# Allegro board QUADCOPTER1brd2_1.brd
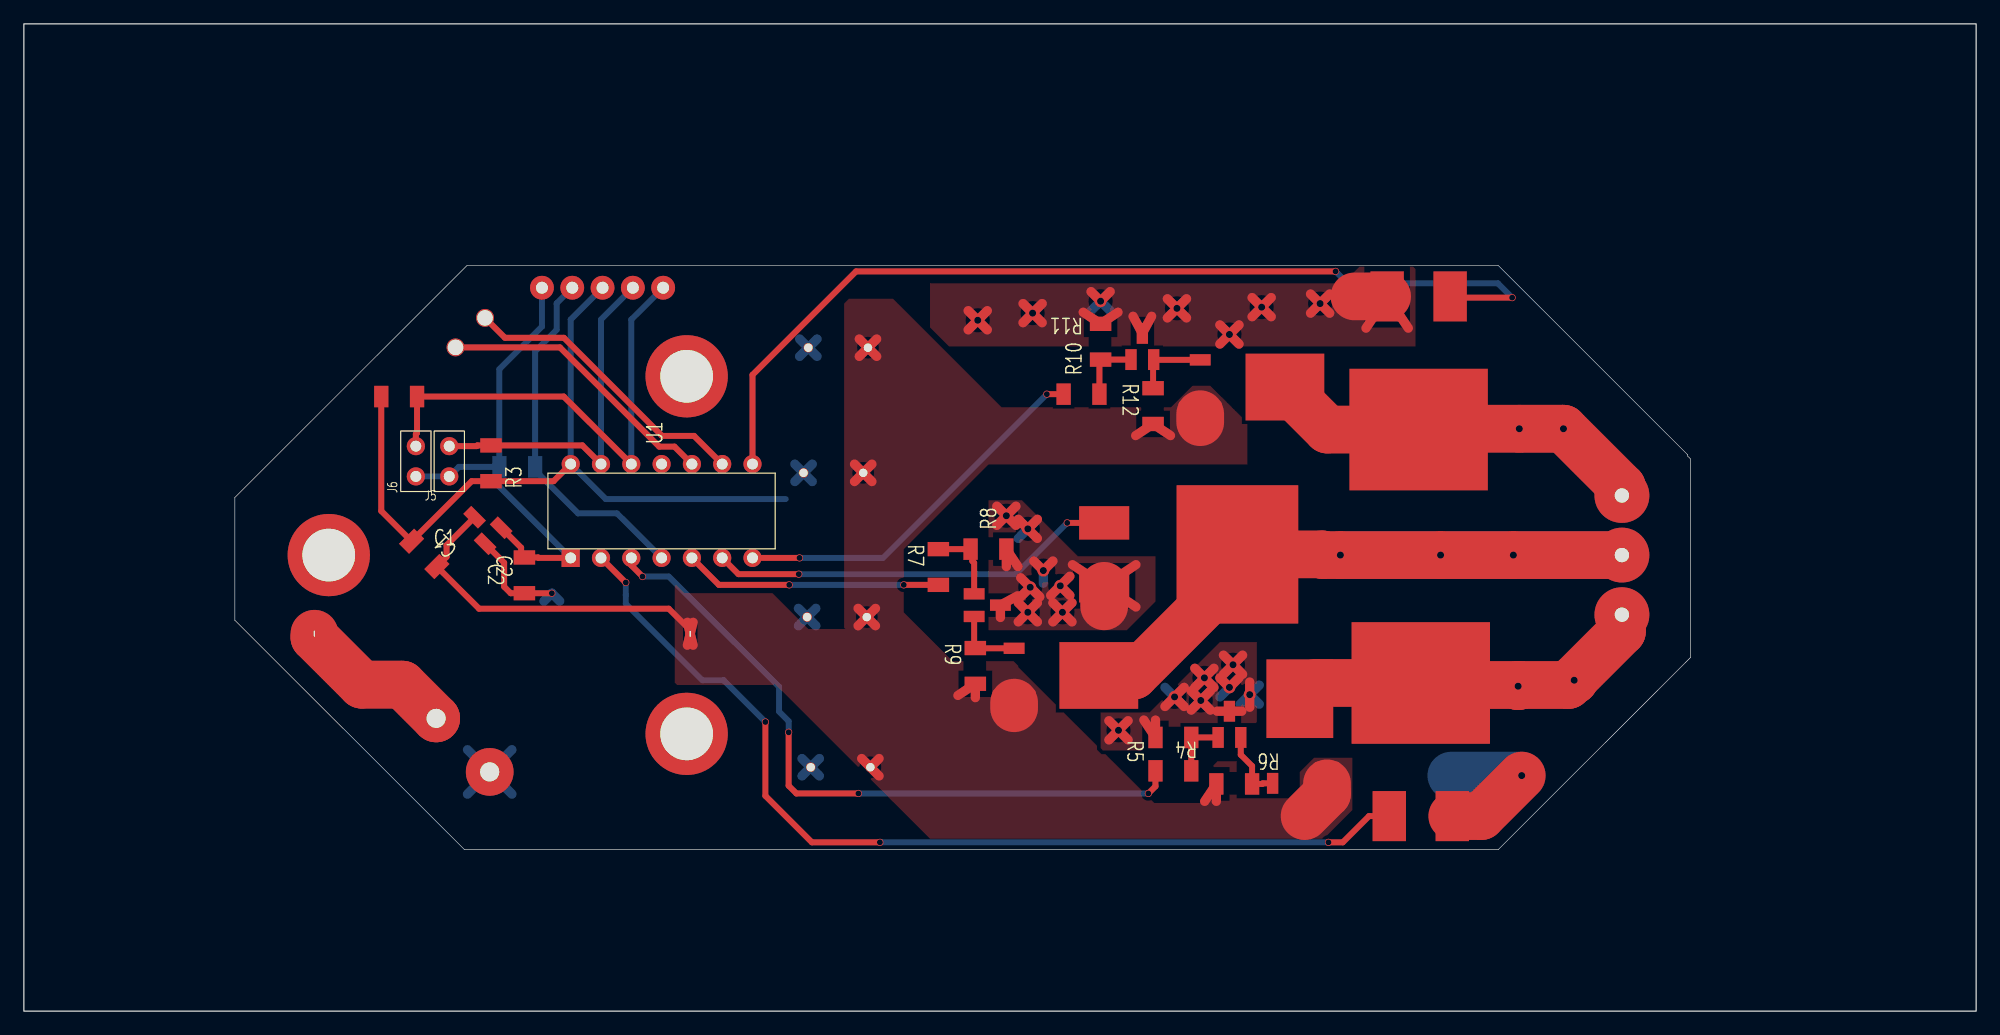
[diagram p0: board, top side]
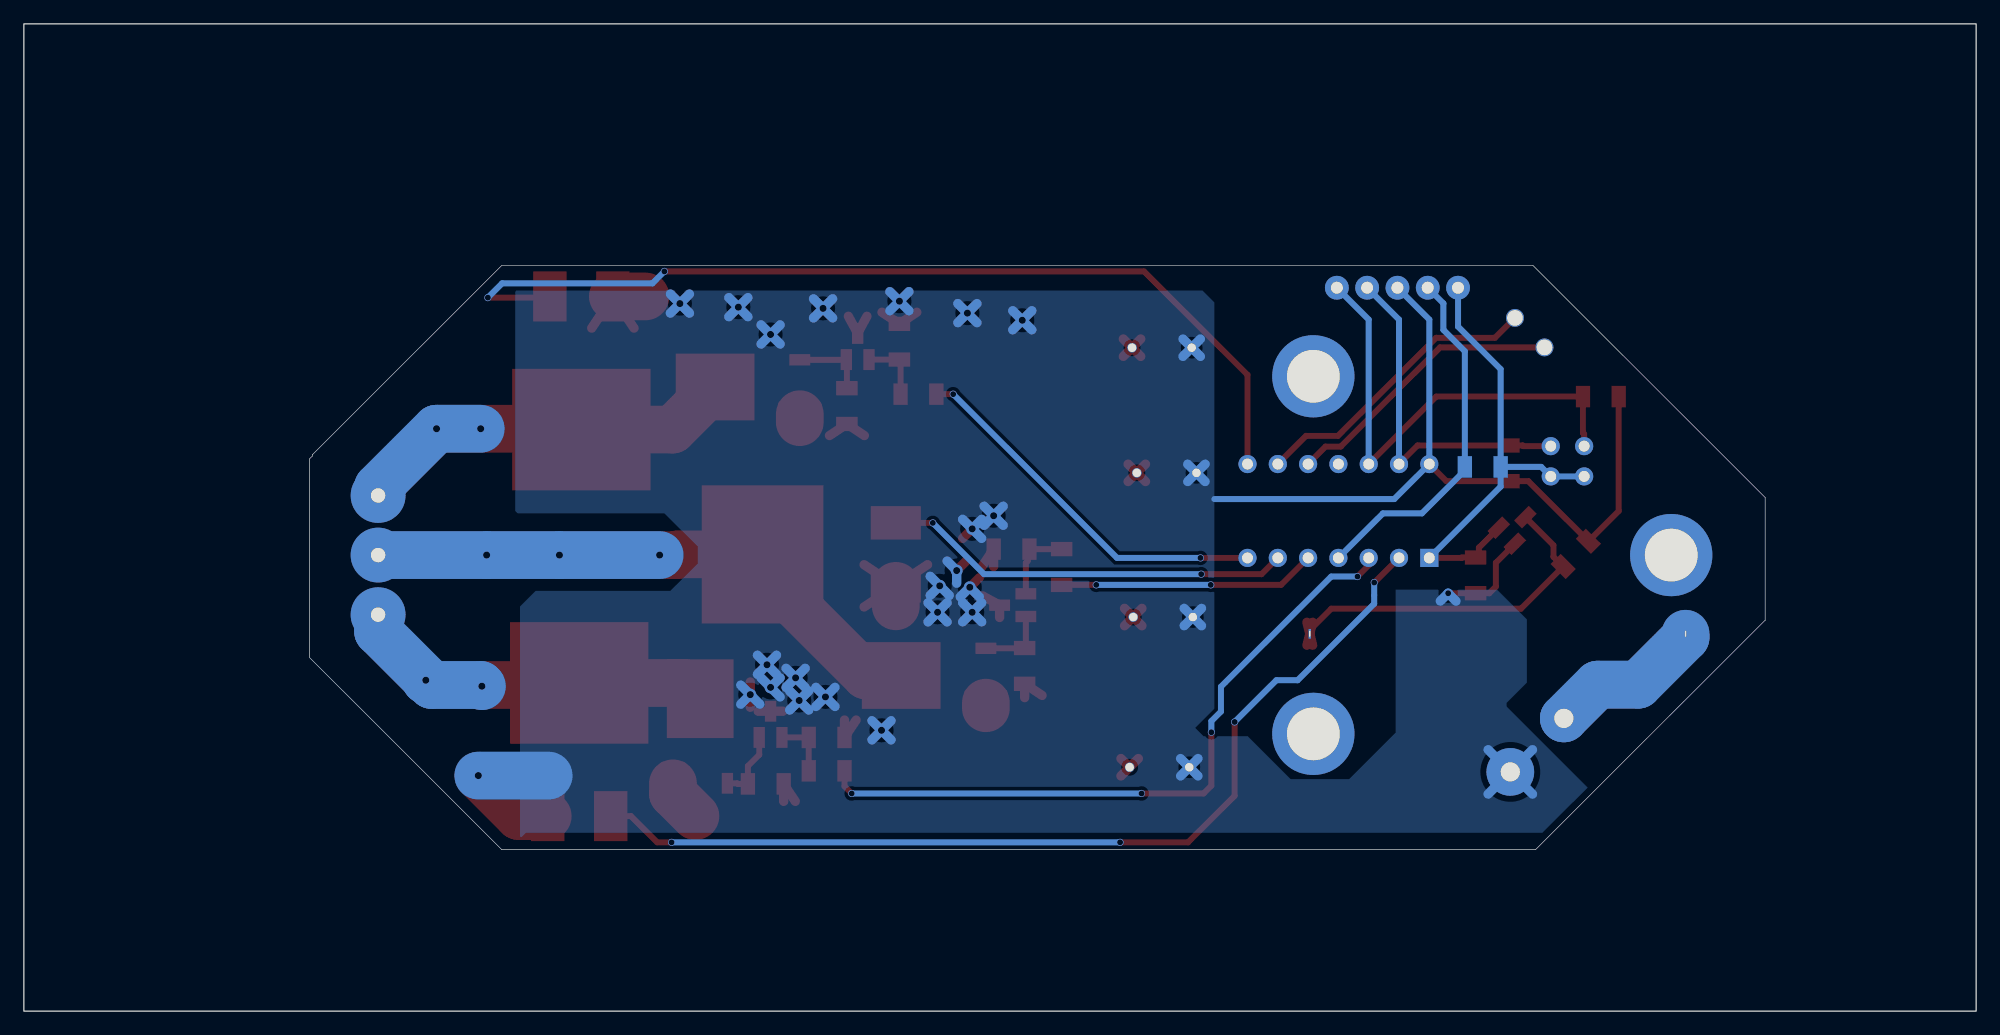
[diagram p1: board, bottom side, seen from below]

Outline 163.65 x 82.83 mm; copper layers: TOP, BOTTOM. Coordinates in mm from the lower left corner of the outline.
Outline path: rectangle 0,0 163.65,82.83 ; 17.69,43.1 17.69,32.8 36.94,13.54 123.58,13.54 139.7,29.66 139.7,46.34 139.48,46.57 139.48,46.68 123.58,62.57 37.16,62.57 17.69,43.1

## Placement (name value [footprint] x y rotation side)
C1  1uF  [SMD_CAP_1206]  33.56 38.36 135 top
C2  1uF  [SMD_CAP_1206]  41.96 36.56 270 top
C3  100uF  [CAP250]  73.76 58.66 180 top
C4  100uF  [CAP250]  73.36 48.16 180 top
C5  100uF  [CAP250]  73.66 36.06 180 top
C6  100uF  [CAP250]  73.96 23.46 180 top
F1  FUSE  [FUSECLIP]  4.36 11.66 0 top
FET1  ON NTD5867  [INF-PG-SOT23_L]  101.06 24.06 90 top
FET2  ON NTD5867  [INF-PG-SOT23_L]  80.76 34.06 0 top
FET3  ON NTD5867  [INF-PG-SOT23_L]  93.76 55.76 90 top
FET4  ON NTD20P06L  [INF-PG-TO252-3-1_N]  106.96 23.86 90 top
FET5  ON NTD20P06L  [INF-PG-TO252-3-1_N]  87.76 28.16 0 top
FET6  ON NTD20P06L  [INF-PG-TO252-3-1_N]  103.36 52.36 0 top
FET7  IRF640NS  [D2PAK]  94.46 -3.64 0 top
FET8  IRF640NS  [D2PAK]  70.56 60.96 270 top
FET9  IRF640NS  [D2PAK]  139.56 79.96 180 top
J1  CON2  [KDCONN2]  34.56 24.56 315 top
J2  CON2  [KDCONN2_2]  38.66 58.16 225 top
J3  To Motor  [ED1362]  136.46 30.76 90 top
J4  CON5  [CONN5]  42.16 61.96 270 top
J5  JUMPER  [JUMPER2]  35.66 44.86 90 top
J6  JUMPER  [JUMPER2]  32.86 44.86 90 top
NOREF  -  [unnamed]  55.56 53.26 0 top
NOREF#2  -  [unnamed]  25.56 38.26 0 top
NOREF#3  -  [unnamed]  55.56 23.26 0 top
Q1  Diodes_AP1117T50L-U  [INF-PG-SOT23_L]  38.56 40.66 135 top
R1  10k  [SMD_RES_1206]  41.36 45.66 180 bottom
R2  10k  [SMD_RES_1206]  31.46 51.56 0 top
R3  10k  [SMD_RES_1206]  39.16 45.96 90 top
R4  10k  [SMD_RES_1206]  96.36 20.16 180 top
R5  10k  [SMD_RES_1206]  96.36 22.96 0 top
R6  10k  [SMD_RES_1206]  101.46 19.06 180 top
R7  10k  [SMD_RES_1206]  76.66 37.26 270 top
R8  10k  [SMD_RES_1206]  80.86 38.76 180 top
R9  10k  [SMD_RES_1206]  79.76 28.96 270 top
R10  10k  [SMD_RES_1206]  88.66 51.76 180 top
R11  10k  [SMD_RES_1206]  90.26 56.16 270 top
R12  10k  [SMD_RES_1206]  94.66 50.76 270 top
U1  PIC16F1503  [PIC16FL1503]  53.46 41.96 90 top

## Library data of the parts
C1-C6 = CAP
F1 = FUSE
FET1-FET3 = ON NTD5867
FET4-FET6 = ON NTD20P06L_0
FET7-FET9 = IRF640NS_0
J1 J2 = CON2
J3 = CON3
J4 = CON5
J5 J6 = JUMPER: User Part Number: ***
Q1 = Diodes_AP1117T50L-U_1
R1-R12 = R
U1 = PIC16LF1503_4

## Footprints (pads in the part's own frame, mm; a bottom-side part is the same pattern mirrored in y, then rotated)
CAP250
  round 0.8 hole 0.7: 1(3,3) 2(8,3)
CONN5
  round 2 hole 1: 1(1.27,11.43) 2(1.27,8.89) 3(1.27,6.35) 4(1.27,3.81) 5(1.27,1.27)
D2PAK
  rect 2.8x4.2 smd: 1(20,20) 3(25.28,20)
  rect 11.6x10.2 smd: 2(22.64,31.17)
ED1362
  round 4.6 hole 1.2: 1(2.5,2.5) 2(7.5,2.5) 3(12.5,2.5)
FUSECLIP
  rect 0.2x0.8 hole 0.1x0.5: 1(20,20) 2(51.5,20)
INF-PG-SOT23_L
  rect 1.75x0.95 smd: 1(-1.1,0.95) 2(-1.1,-0.95) 3(1.1,0)
INF-PG-TO252-3-1_N
  rect 1.75x0.95 smd: 1(-4.75,2.28) 3(-4.75,-2.28)
  rect 6.6x5.6 smd: 2(2.35,0)
JUMPER2
  round 1.524 hole 0.914: 1(0,0) 2(2.54,0)
KDCONN2
  round 4 hole 1.6: 1(0,0) 2(6.35,0)
KDCONN2_2
  round 1.5 hole 1.3: 1(0,0) 2(3.5,0)
PIC16FL1503
  rect 1.524x1.524 hole 0.914: 1(-3.937,7.62)
  round 1.524 hole 0.914: 2(-3.937,5.08) 3(-3.937,2.54) 4(-3.937,0) 5(-3.937,-2.54) 6(-3.937,-5.08) 7(-3.937,-7.62) 8(3.937,-7.62) 9(3.937,-5.08) 10(3.937,-2.54) 11(3.937,0) 12(3.937,2.54) 13(3.937,5.08) 14(3.937,7.62)
SMD_CAP_1206
  rect 1.2x1.8 smd: 1(-1.5,0) 2(1.5,0)
SMD_RES_1206
  rect 1.2x1.8 smd: 1(-1.5,0) 2(1.5,0)
unnamed
  round 6.9 hole 4.42: (0,0)

## Nets
12V: C1.1 C3.1 C4.1 C5.1 C6.1 F1.2 FET4.3(S) FET5.3(S) FET6.3(S) Q1.3(VIN) R6.2 R9.2 R12.2
GND: C1.2 C2.2 C3.2 C4.2 C5.2 C6.2 FET1.3(S) FET2.3(S) FET3.3(S) FET7.3(S) FET8.3(S) FET9.3(S) J1.2 J4.3 Q1.1(GND) R2.1 R3.1 R5.1 R8.1 R11.1 U1.14(VSS)
A: FET4.2(D) FET7.2(D) J3.1
ADDR0: J4.2 J5.2 R3.2 U1.13(ICSPDAT/ADDR0)
ADDR1: J4.1 J6.2 R2.2 U1.12(ICSPCLK/ADDR1)
AHIGH: R4.2 U1.3(RA4)
ALOW: FET7.1(G) U1.2(RA5)
B: FET5.2(D) FET8.2(D) J3.2
BHIGH: R7.2 U1.5(RC5)
BLOW: FET8.1(G) U1.6(RC4)
C: FET6.2(D) FET9.2(D) J3.3
CHIGH: R10.2 U1.7(RC3)
CLOW: FET9.1(G) U1.8(RC2)
NMCLR: J4.4 R1.1 U1.4(NMCLR)
SCL: J2.2 U1.10(SCL)
SDA: J2.1 U1.9(SDA)
VEXT: C2.1 J4.5 J5.1 J6.1 Q1.2(VOUT) R1.2 U1.1(VDD)
N76044: F1.1 J1.1
N143086: FET1.1(G) R4.1 R5.2
N143844: FET2.1(G) R7.1 R8.2
N143928: FET2.2(D) FET5.1(G) R9.1
N144222: FET3.2(D) FET6.1(G) R12.1
N144242: FET3.1(G) R10.1 R11.2
N158488: FET1.2(D) FET4.1(G) R6.1

Pads without a net: U1 11

## Via types
v1: diameter 0.6, hole 0.5, TOP to BOTTOM, 17 vias
v2: diameter 1, hole 0.6, TOP to BOTTOM, 29 vias

## Routing (per net, layer and track width the routed paths; a pad name or vN(x,y) marks a point on that pad's centre or on a via; arc(x,y) is an arc through that point)
12V: length 82.5
  TOP w0.5: Q1.3 35.43,39.09 35.43,38.12 C1.1 38.16,33.76 54.06,33.76 55.86,31.96 F1.2
  TOP w0.781: 70.03,54.94 C3.1 ; C3.1 71.49,56.39 ; C3.1 71.49,54.94 ; C3.1 70.03,56.39 ; 79.76,26.3 R9.2 78.3,26.49 ; C5.1 71.39,33.79 ; C5.1 69.93,33.79 ; C5.1 69.93,32.34 ; C5.1 71.39,32.34 ; C6.1 71.69,19.74 ; C6.1 70.23,21.19 ; C6.1 71.69,21.19 ; 55.62,32.62 F1.2 ; F1.2 56.1,32.62 ; F1.2 56.1,30.7 ; F1.2 55.62,30.7 ; 97.18,49.31 FET6.3 ; FET6.3 100.04,50.86 ; FET6.3 97.18,50.86 ; FET6.3 100.04,49.31 ; C4.1 71.09,45.89 ; C4.1 71.09,44.44 ; C4.1 69.63,44.44 ; C4.1 69.63,45.89 ; 98.99,17.6 R6.2 99.96,17.6 ; 108.46,17.68 FET4.3 ; FET4.3 108.46,20.55 ; FET4.3 110.02,20.55 ; FET4.3 110.02,17.68 ; FET5.3 84.44,25.11 ; FET5.3 84.44,26.66 ; FET5.3 81.58,25.11 ; FET5.3 81.58,26.66 ; 93.2,48.29 R12.2 96.12,48.29
  TOP w4: FET4.3 109.24,18.24 107.36,16.36 ; FET5.3 83.01,25.41 ; FET6.3 98.61,49.41
GND: length 320.4
  TOP w0.5: R2.1 29.96,41.96 C1.2 37.54,44.46 R3.1 44.4,44.46 U1.14 ; Q1.1 40.26,37.62 40.26,35.61 40.81,35.06 C2.2 v1(44.26,35.06)
  TOP w0.781: v2(103.76,59.06) 104.56,59.86 ; v2(103.76,59.06) 102.96,59.86 ; v2(103.76,59.06) 102.96,58.26 ; v2(103.76,59.06) 104.56,58.26 ; 81.56,42.36 v2(82.36,41.56) ; v2(82.36,41.56) 83.16,42.36 ; v2(82.36,41.56) 81.56,40.76 ; v2(82.36,41.56) 83.16,40.76 ; v2(98.66,26.06) 99.46,26.86 ; v2(98.66,26.06) 99.46,25.26 ; v2(98.66,26.06) 97.86,26.86 ; v2(98.66,26.06) 97.86,25.26 ; v2(98.96,27.96) 99.76,28.76 ; v2(98.96,27.96) 98.16,28.76 ; v2(98.96,27.96) 98.16,27.16 ; v2(98.96,27.96) 99.76,27.16 ; 100.26,55.97 v2(101.06,56.77) ; v2(101.06,56.77) 100.26,57.57 ; v2(101.06,56.77) 101.86,55.97 ; v2(101.06,56.77) 101.86,57.57 ; 88.8,58.64 R11.1 91.72,58.64 ; 84.66,37.76 v2(85.46,36.96) 86.26,37.76 ; v2(84.56,58.56) 85.36,59.36 ; v2(84.56,58.56) 83.76,57.76 ; v2(84.56,58.56) 85.36,57.76 ; v2(84.56,58.56) 83.76,59.36 ; v2(87.06,33.46) 87.86,34.26 ; v2(87.06,33.46) 86.26,32.66 ; v2(87.06,33.46) 86.26,34.26 ; v2(87.06,33.46) 87.86,32.66 ; 86.08,34.88 v2(86.88,35.68) ; v2(86.88,35.68) 87.68,34.88 ; v2(86.88,35.68) 87.68,36.48 ; 93.89,24.42 R5.1 94.86,24.42 ; v2(101.36,29.06) 102.16,28.26 ; v2(101.36,29.06) 100.56,28.26 ; v2(101.36,29.06) 102.16,29.86 ; v2(101.36,29.06) 100.56,29.86 ; 92.98,58.3 FET3.3 94.54,58.3 ; 102.09,25.16 FET1.3 100.03,25.16 ; v2(84.16,33.46) 84.96,32.66 ; v2(84.16,33.46) 83.36,32.66 ; v2(84.16,33.46) 83.36,34.26 ; v2(84.16,33.46) 84.96,34.26 ; FET8.3 93.22,37.46 ; FET8.3 87.9,37.46 ; FET8.3 93.22,33.91 ; v2(84.16,40.46) 84.96,41.26 ; v2(84.16,40.46) 84.96,39.66 ; v2(84.16,40.46) 83.36,41.26 ; 91.06,60.36 v2(90.26,59.56) 89.46,60.36 ; 83.33,37.3 R8.1 82.36,37.3 ; 116.05,57.3 FET9.3 112.51,57.3 ; 107.86,60.16 v2(108.66,59.36) ; v2(108.66,59.36) 109.46,60.16 ; v2(108.66,59.36) 109.46,58.56 ; v2(108.66,59.36) 107.86,58.56 ; v2(91.76,23.56) 92.56,22.76 ; v2(91.76,23.56) 90.96,22.76 ; v2(91.76,23.56) 90.96,24.36 ; v2(91.76,23.56) 92.56,24.36 ; v2(79.96,57.96) 80.76,57.16 ; v2(79.96,57.96) 79.16,57.16 ; v2(79.96,57.96) 79.16,58.76 ; v2(79.96,57.96) 80.76,58.76 ; 101.86,27.96 v2(101.06,27.16) 100.26,27.96 ; 102.76,25.5 v2(102.76,26.56) 102.76,27.62 ; v2(96.66,58.96) 97.46,58.16 ; v2(96.66,58.96) 97.46,59.76 ; v2(96.66,58.96) 95.86,59.76 ; v2(96.66,58.96) 95.86,58.16 ; 83.29,34.84 FET2.3 81.86,33.03 ; v2(84.36,35.56) 85.16,34.76 ; v2(84.36,35.56) 83.56,34.76 ; v2(84.36,35.56) 83.56,36.36 ; v2(96.46,26.36) 97.26,27.16 ; v2(96.46,26.36) 97.26,25.56 ; v2(96.46,26.36) 95.66,25.56
  TOP w4: FET7.3 122.16,16.36 v2(125.56,19.76) ; FET9.3 111.54,59.96 ; FET8.3 90.56,33.96
  BOTTOM w0.5: J4.3 45.84,58.02 U1.14 48.78,42.96 63.86,42.96
  BOTTOM w0.781: v2(103.76,59.06) 104.56,59.86 ; v2(103.76,59.06) 104.56,58.26 ; v2(103.76,59.06) 102.96,59.86 ; v2(103.76,59.06) 102.96,58.26 ; 83.36,34.26 v2(84.16,33.46) ; v2(84.16,33.46) 84.96,34.26 ; v2(84.16,33.46) 83.36,32.66 ; v2(84.16,33.46) 84.96,32.66 ; 64.63,45.89 C4.2 ; C4.2 66.09,44.44 ; C4.2 64.63,44.44 ; C4.2 66.09,45.89 ; 95.66,27.16 v2(96.46,26.36) ; v2(96.46,26.36) 95.66,25.56 ; v2(96.46,26.36) 97.26,25.56 ; v2(96.46,26.36) 97.26,27.16 ; v2(91.76,23.56) 92.56,24.36 ; v2(91.76,23.56) 92.56,22.76 ; v2(91.76,23.56) 90.96,24.36 ; v2(91.76,23.56) 90.96,22.76 ; C5.2 66.39,32.34 ; C5.2 64.93,33.79 ; C5.2 66.39,33.79 ; C5.2 64.93,32.34 ; v2(101.06,56.77) 101.86,55.97 ; v2(101.06,56.77) 100.26,55.97 ; v2(101.06,56.77) 100.26,57.57 ; v2(101.06,56.77) 101.86,57.57 ; 83.76,57.76 v2(84.56,58.56) ; v2(84.56,58.56) 85.36,59.36 ; v2(84.56,58.56) 85.36,57.76 ; v2(84.56,58.56) 83.76,59.36 ; v2(87.06,33.46) 87.86,34.26 ; v2(87.06,33.46) 86.26,34.26 ; v2(87.06,33.46) 87.86,32.66 ; v2(87.06,33.46) 86.26,32.66 ; 81.56,40.76 v2(82.36,41.56) ; v2(82.36,41.56) 81.56,42.36 ; v2(82.36,41.56) 83.16,42.36 ; v2(82.36,41.56) 83.16,40.76 ; 65.23,21.19 C6.2 ; C6.2 66.69,21.19 ; C6.2 66.69,19.74 ; C6.2 65.23,19.74 ; 43.6,34.41 v1(44.26,35.06) 44.92,34.41 ; v2(98.96,27.96) 99.76,28.76 ; v2(98.96,27.96) 99.76,27.16 ; v2(98.96,27.96) 98.16,27.16 ; v2(98.96,27.96) 98.16,28.76 ; 79.16,58.76 v2(79.96,57.96) ; v2(79.96,57.96) 79.16,57.16 ; v2(79.96,57.96) 80.76,57.16 ; v2(79.96,57.96) 80.76,58.76 ; v2(90.26,59.56) 91.06,58.76 ; v2(90.26,59.56) 89.46,60.36 ; v2(90.26,59.56) 91.06,60.36 ; v2(90.26,59.56) 89.46,58.76 ; 107.86,58.56 v2(108.66,59.36) ; v2(108.66,59.36) 107.86,60.16 ; v2(108.66,59.36) 109.46,58.56 ; v2(108.66,59.36) 109.46,60.16 ; v2(102.76,26.56) 103.56,27.36 ; v2(102.76,26.56) 103.56,25.76 ; v2(102.76,26.56) 101.96,25.76 ; C3.2 66.49,54.94 ; C3.2 66.49,56.39 ; C3.2 65.03,54.94 ; C3.2 65.03,56.39 ; 100.26,26.36 v2(101.06,27.16) ; v2(101.06,27.16) 100.26,27.96 ; v2(101.06,27.16) 101.86,27.96 ; v2(96.66,58.96) 97.46,59.76 ; v2(96.66,58.96) 95.86,58.16 ; v2(96.66,58.96) 95.86,59.76 ; v2(96.66,58.96) 97.46,58.16 ; v2(86.88,35.68) 87.68,34.88 ; v2(86.88,35.68) 87.68,36.48 ; v2(86.88,35.68) 86.08,34.88 ; v2(101.36,29.06) 102.16,29.86 ; v2(101.36,29.06) 100.56,28.26 ; v2(101.36,29.06) 102.16,28.26 ; v2(101.36,29.06) 100.56,29.86 ; 97.86,26.86 v2(98.66,26.06) ; v2(98.66,26.06) 97.86,25.26 ; v2(98.66,26.06) 99.46,26.86 ; v2(98.66,26.06) 99.46,25.26 ; 83.36,41.26 v2(84.16,40.46) ; v2(84.16,40.46) 84.96,41.26 ; v2(84.16,40.46) 83.36,39.66 ; J1.2 40.91,21.93 ; J1.2 40.91,18.21 ; J1.2 37.19,21.93 ; J1.2 37.19,18.21 ; 85.46,35.91 v2(85.46,36.96) 86.26,37.76 ; 85.16,34.76 v2(84.36,35.56) 83.56,34.76
  BOTTOM w4: v2(125.56,19.76) 119.66,19.76
A: length 43.1
  TOP w4: FET4.2 108.28,27.53 FET7.2 117.27,27.36 125.16,27.36 v2(125.26,27.26) 125.36,27.36 129.46,27.36 129.86,27.76 v2(129.96,27.76) 129.96,27.86 133.96,31.86 J3.1
  BOTTOM w4: J3.1 133.96,31.86 129.96,27.86 v2(129.96,27.76) 129.86,27.76 129.46,27.36 125.36,27.36 v2(125.26,27.26)
ADDR0: length 29.3
  TOP w0.5: U1.13 46.82,47.46 R3.2 38.01,47.46 37.95,47.4 J5.2
  BOTTOM w0.5: U1.13 48.38,58.02 J4.2
ADDR1: length 40.4
  TOP w0.5: U1.12 45.26,51.56 R2.2 32.96,48.52 32.86,48.42 J6.2
  BOTTOM w0.5: U1.12 50.92,58.02 J4.1
AHIGH: length 58.4
  TOP w0.5: v1(64.11,23.4) 64.11,18.91 64.76,18.26 v1(69.96,18.26) ; U1.3 50.92,37.4 v1(51.86,36.46) ; R4.2 94.86,18.86 v1(94.26,18.26)
  BOTTOM w0.5: v1(94.26,18.26) v1(69.96,18.26) ; v1(51.86,36.46) 54.06,36.46 63.31,27.22 63.31,25.13 64.11,24.33 v1(64.11,23.4)
ALOW: length 81.6
  TOP w0.5: FET7.1 112.76,16.36 110.56,14.16 v1(109.36,14.16) ; v1(50.46,35.96) 50.44,35.96 U1.2 ; v1(62.16,24.26) 62.16,18.06 66.06,14.16 v1(71.76,14.16)
  BOTTOM w0.5: v1(50.46,35.96) 50.46,34.89 50.46,34.18 56.88,27.76 58.66,27.76 v1(62.16,24.26) ; v1(71.76,14.16) v1(109.36,14.16)
B: length 72.6
  TOP w4: FET5.2 93.06,28.16 101.73,36.83 FET8.2 108.83,38.32 108.89,38.26 v2(110.36,38.26) v2(118.76,38.26) v2(124.86,38.26) J3.2
  BOTTOM w4: J3.2 v2(124.86,38.26) v2(118.76,38.26) v2(110.36,38.26)
BHIGH: length 21.6
  TOP w0.5: U1.5 58.26,35.76 v1(64.16,35.76) ; R7.2 v1(73.76,35.76)
  BOTTOM w0.5: v1(64.16,35.76) v1(73.76,35.76)
BLOW: length 34.4
  TOP w0.5: U1.6 59.9,36.66 v1(64.96,36.66) ; v1(87.46,40.96) FET8.1
  BOTTOM w0.5: v1(87.46,40.96) 83.16,36.66 v1(64.96,36.66)
C: length 44.3
  TOP w4: 116.99,48.86 v2(125.36,48.86) v2(129.06,48.86) 133.96,43.96 J3.3 ; 116.99,48.86 FET9.2 109.28,48.79 FET6.2 ; 116.99,48.86 117.32,49.19
  BOTTOM w4: J3.3 133.96,43.96 v2(129.06,48.86) v2(125.36,48.86)
CHIGH: length 31.8
  TOP w0.5: U1.7 v1(65.02,38.03) ; R10.2 v1(85.75,51.76)
  BOTTOM w0.5: v1(85.75,51.76) 72.02,38.03 v1(65.02,38.03)
CLOW: length 80.9
  TOP w0.5: FET9.1 119.66,59.86 v1(124.76,59.86) ; U1.8 61.08,53.38 69.76,62.06 v1(109.96,62.06)
  BOTTOM w0.5: v1(124.76,59.86) 123.56,61.06 110.96,61.06 v1(109.96,62.06)
NMCLR: length 30.3
  BOTTOM w0.5: U1.4 49.72,41.76 46.46,41.76 42.86,45.36 R1.1 42.86,55.36 44.66,57.16 44.66,59.38 J4.4
SCL: length 23.9
  TOP w0.5: U1.10 54.54,47.36 53.26,47.36 44.93,55.69 J2.2
SDA: length 25
  TOP w0.5: U1.9 56.18,48.26 53.5,48.26 45.27,56.49 40.33,56.49 J2.1
VEXT: length 41.4
  TOP w0.5: U1.1 43.15,38.03 43.11,38.06 C2.1 41.71,38.31 arc(41.7,38.33) 41.68,38.34 41.68,38.88 Q1.2
  BOTTOM w0.5: R1.2 36.46,45.66 J5.1 ; R1.2 39.86,44.01 U1.1 ; R1.2 39.86,53.86 43.43,57.43 J4.5 ; J5.1 35.86,44.86 ; J5.1 J6.1
N76044: length 26.6
  TOP w4: F1.1 24.36,31.36 28.33,27.39 31.73,27.39 J1.1
  BOTTOM w4: J1.1 31.73,27.39 28.33,27.39 24.36,31.36 F1.1
N143086: length 5.3
  TOP w0.5: 100.26,22.96 FET1.1 R5.2 R4.1 97.86,20.06
N143844: length 6.6
  TOP w0.5: R7.1 R8.2 79.51,38.61 79.51,37.76 79.66,37.61 FET2.1
N143928: length 5.9
  TOP w0.5: FET5.1 79.78,30.44 R9.1 79.66,30.56 FET2.2
N144222: length 6.3
  TOP w0.5: R12.1 94.66,54.61 94.69,54.64 ; 94.69,54.64 FET6.1 ; 94.69,54.64 FET3.2
N144242: length 5.5
  TOP w0.5: R10.1 90.16,54.56 R11.2 FET3.1
N158488: length 6
  TOP w0.5: FET4.1 103.86,19.11 103.81,19.06 R6.1 102.96,20.56 102.01,21.51 FET1.2

## Copper pours and planes (outline as drawn; the poured copper is in the pictures)
12V on TOP: 54.56,35.86 54.56,27.56 54.76,27.36 62.86,27.36 62.96,27.46 75.96,14.46 108.96,14.46 111.36,16.86 111.36,21.26 108.16,21.26 106.96,20.06 106.96,18.26 106.56,17.86 101.66,17.86 101.66,20.86 101.76,20.96 100.06,20.96 98.96,19.86 98.96,17.56 98.86,17.46 94.76,17.46 83.36,28.86 83.36,28.96 82.96,29.36 77.86,29.36 73.76,33.46 73.76,38.76 80.86,45.86 102.56,45.86 102.56,49.36 99.46,52.46 97.96,52.46 96.16,50.66 81.96,50.66 72.86,59.76 69.16,59.76 68.76,59.36 68.76,32.16 68.86,32.06 65.76,32.06 62.76,35.06 55.36,35.06
GND on TOP: 80.86,31.96 80.86,42.86 83.66,42.86 88.36,38.16 94.86,38.16 94.86,34.36 92.46,31.96
GND on TOP: 90.46,21.86 96.36,21.86 96.56,21.66 96.96,22.06 96.96,24.16 103.26,24.16 103.36,24.26 103.36,30.96 100.26,30.96 94.36,25.06 90.26,25.06 90.26,22.06
GND on TOP: 116.66,55.76 116.66,62.26 116.46,62.46 111.96,62.46 110.56,61.06 76.06,61.06 75.96,61.16 75.96,57.36 77.56,55.76
GND on BOTTOM: 122.06,14.46 122.06,33.96 120.76,35.26 109.46,35.26 107.16,37.56 107.16,38.96 109.96,41.76 122.26,41.76 122.46,41.96 122.46,60.36 122.36,60.46 64.86,60.46 63.86,59.46 63.86,25.36 65.46,23.76 64.76,23.06 61.06,23.06 57.46,19.46 52.56,19.46 48.66,23.36 48.66,35.36 40.16,35.36 37.66,32.86 37.66,27.56 39.36,25.86 39.36,25.56 32.56,18.76 36.36,14.96 121.56,14.96
